# Altium PCB Display Segmental LCD118x1 DF700543-05 Backlight TB1012S.PcbDoc
Units mm, origin at the board's own origin, x right, y up, seen from the top; angles counter-clockwise.
Board outline 65 x 44 mm, 2 copper layers (Top Layer, Bottom Layer); 14 components, 17 nets, 44 pads, 0 vias.
Unrouted connection lines stored in the file: 17.
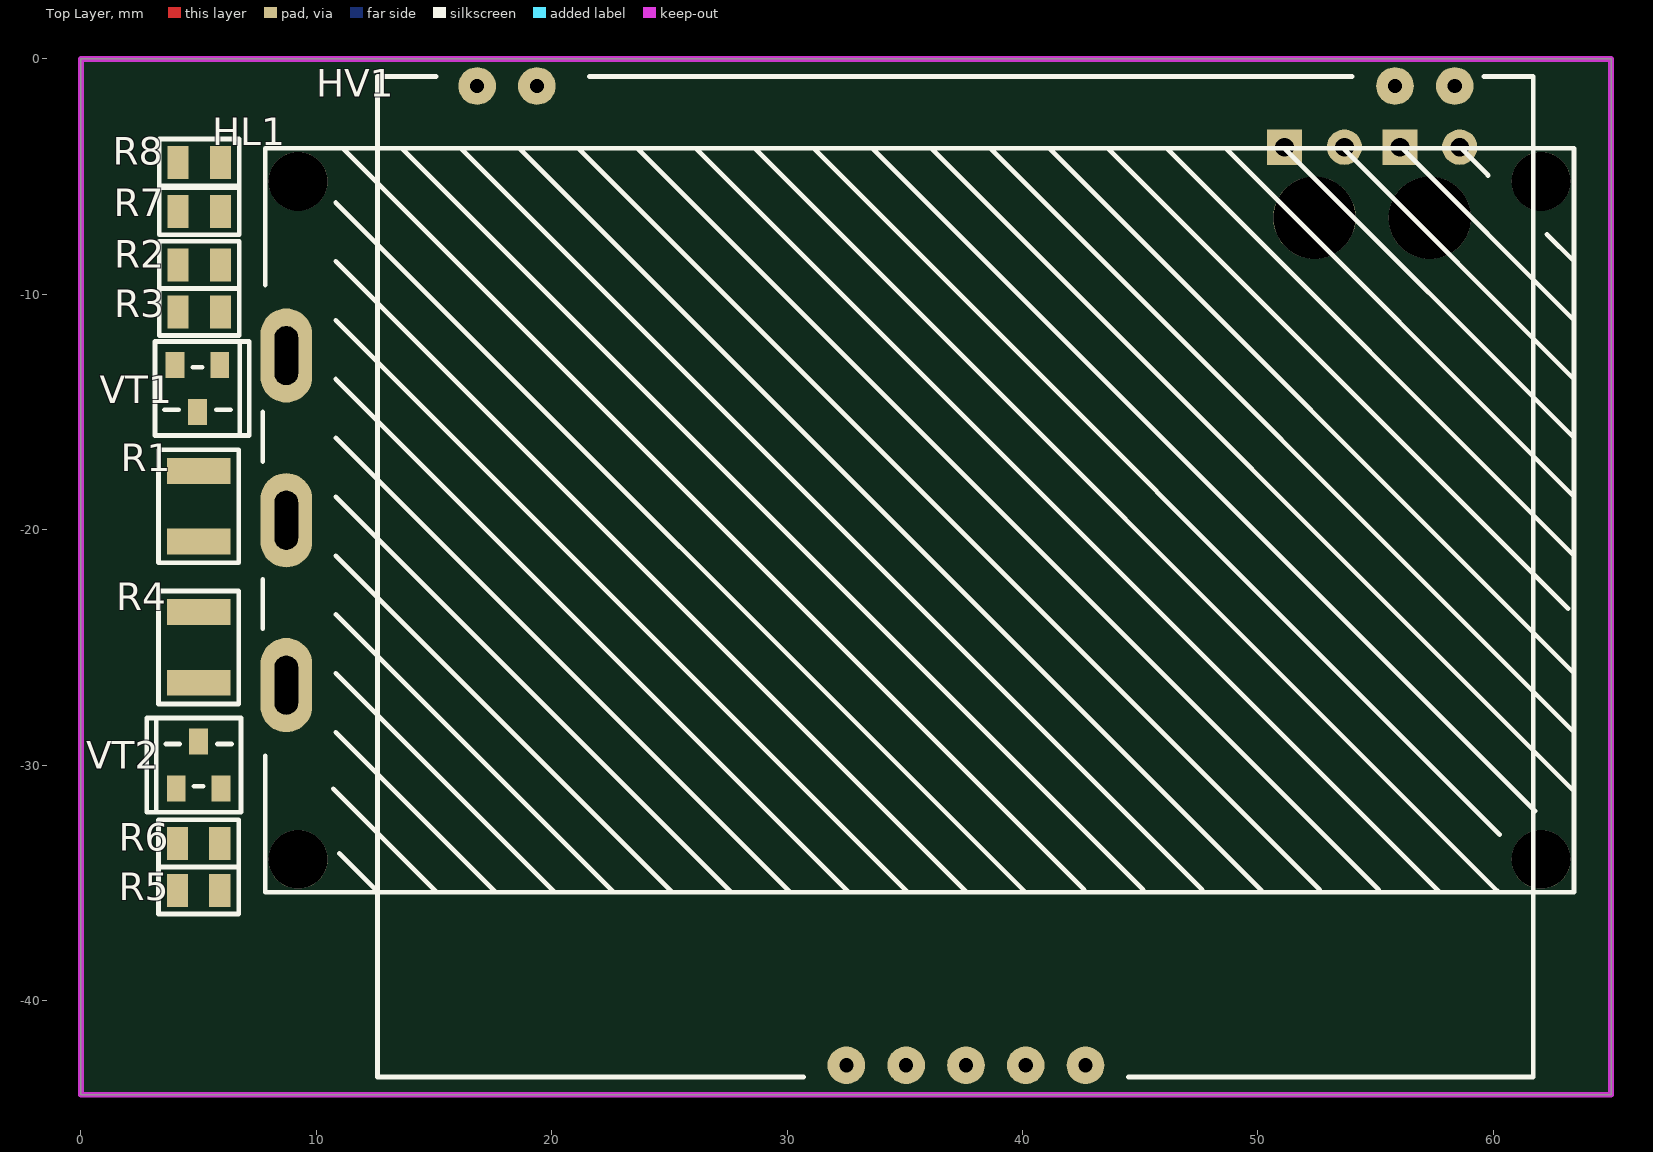
[diagram p0: Top Layer view]
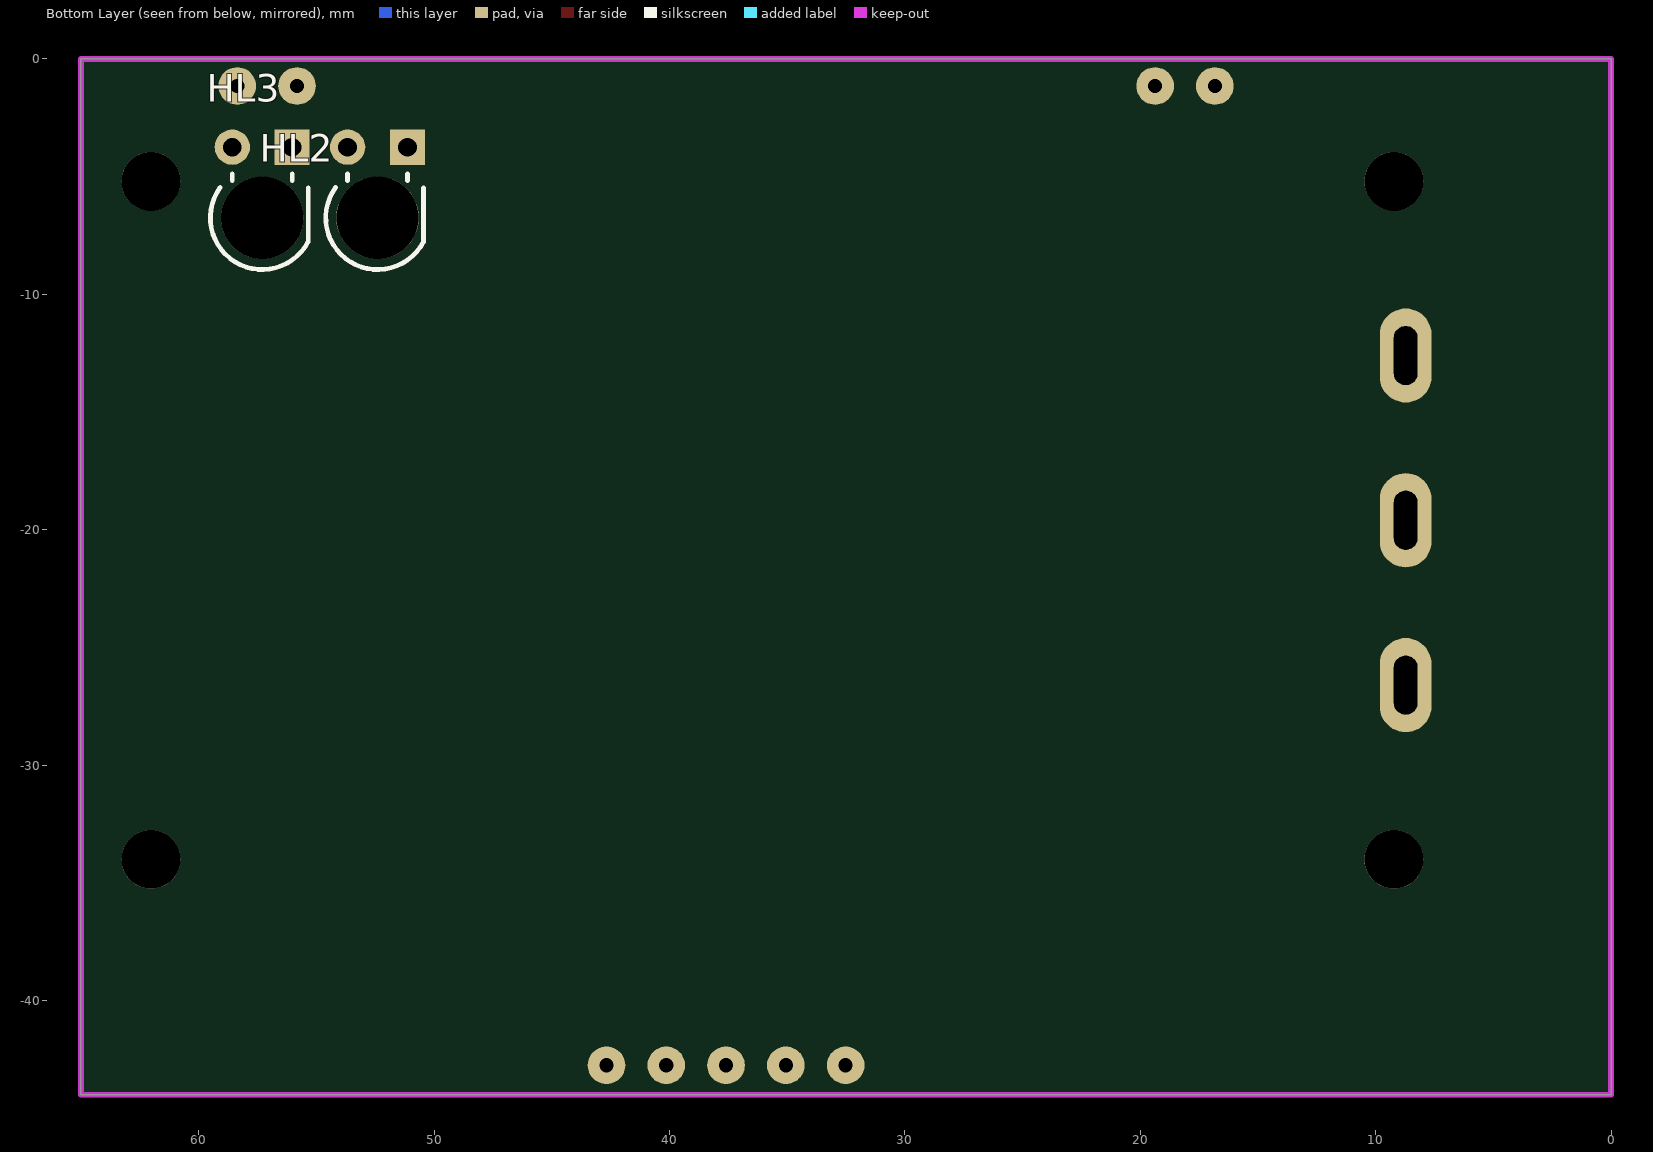
[diagram p1: Bottom Layer view, seen from below]

## Layer stack, top to bottom
Top Solder: solder mask 0.0102, Solder Resist, Dk 3.5
Top Layer: signal copper 0.0356
Dielectric 1: dielectric 0.32, FR-4, Dk 4.8
Bottom Layer: signal copper 0.0356
Bottom Solder: solder mask 0.0102, Solder Resist, Dk 3.5

## Board outline
0,-44 65,-44 65,0 0,0

## Design rules (kind name [scope] priority, off if disabled: settings)
Clearance "Schematic Clearance Constraint" [InNetClass('Signals 100kHz')] p1: gap=0.2 ignorepadtopadclearanceinfootprint=FALSE
Clearance "Schematic Clearance Constraint_2" [InNetClass('Power 0.5A')] p2: gap=0.3 ignorepadtopadclearanceinfootprint=FALSE
Clearance [All] p3: gap=0.152 ignorepadtopadclearanceinfootprint=FALSE
ComponentClearance [All] p1: gap=0 collisioncheckmode=3 verticalgap=0 showdistances=FALSE
PolygonConnect [All] p1: connectstyle=Relief reliefconductorwidth=0.254 reliefentries=4 polygonreliefangle="90 Angle" airgapwidth=0.254
RoomDefinition "Display Segmental LCD118x1 DF700543-05 Backlight TB1012S" [InComponentClass('Display Segmental LCD118x1 DF700543-05 Backlight TB1012S')] p1: confinementstyle=ConfineIn formatcopy=TRUE lockcomponents=FALSE outline 0,-44 65,-44 65,0 0,0
RoutingVias "Schematic Routing Via Style" [InNetClass('Signals 100kHz')] p1: holewidth=0.5 width=1.1 viastyle="Through Hole" minholewidth=0.4 minwidth=0.9 maxholewidth=0.8 maxwidth=1.6
RoutingVias "Schematic Routing Via Style_1" [InNetClass('Power 0.5A')] p2: holewidth=0.8 width=1.5 viastyle="Through Hole" minholewidth=0.8 minwidth=1.5 maxholewidth=0.8 maxwidth=1.5
RoutingVias [All] p3: holewidth=0.5 width=1 viastyle="Through Hole" minholewidth=0.2 minwidth=0.5 maxholewidth=1 maxwidth=2
SolderMaskExpansion [All] p1: expansion=0.102
Width "Schematic Width Constraint_1" [InNetClass('Signals 100kHz')] p1: maxlimit=0.5 minlimit=0.1 preferedwidth=0.25 minimp=50.000000 maximp=50.000000 favimp=50.000000
Width "Schematic Width Constraint_2" [InNetClass('Power 0.5A')] p2: maxlimit=1 minlimit=0.3 preferedwidth=0.5 minimp=50.000000 maximp=50.000000 favimp=50.000000
Width Width_2 [InNet('3V3')] p3: maxlimit=1 minlimit=0.15 preferedwidth=0.3 minimp=50.000000 maximp=50.000000 favimp=50.000000
Width Width_6 [InNet('GND')] p4: maxlimit=1 minlimit=0.15 preferedwidth=0.3 minimp=50.000000 maximp=50.000000 favimp=50.000000
Width Width_1 [InNet('CSR_PWR')] p5: maxlimit=1 minlimit=0.15 preferedwidth=0.3 minimp=50.000000 maximp=50.000000 favimp=50.000000
Width Width_3 [InNet('VDD_PADS')] p6: maxlimit=1 minlimit=0.15 preferedwidth=0.3 minimp=50.000000 maximp=50.000000 favimp=50.000000
Width [InNetClass('All Nets')] p7: maxlimit=1 minlimit=0.152 preferedwidth=0.152 minimp=50.000000 maximp=50.000000 favimp=50.000000
29 further rules are at their usual default settings.

## Classes and differential pairs
net class "Signals 100kHz": 5V BL_BLUE BL_GREEN DCLK DIN GND LED_ERR LED_WAIT LOAD NetHL2_2 NetHL3_2 NetR2_2 NetR5_2
net class "Power 0.5A": 5V GND NetHL1_2 NetHL1_3 NetR1_2 NetR4_2

## Components (designator, comment, footprint, x,y, rotation, side; value= is the part's Value field where it differs from the comment)
HL1 "TB1012S" "DISP BKL LED TB1012S" 35.625,-19.6 r0 top
HL2 "Yellow" LEDD3TBN 52.4,-3.75 r180 bottom
HL3 "Red" LEDD3TBN 57.3,-3.75 r180 bottom
HV1 "DF700543-05" "DISP SEG LCD128 DF700543-05" 37.595,-21.95 r0 top
R1 "20" RESC3225N 5,-19 r90 top
R2 "100" RESC2012N 5.025,-8.75 r0 top
R3 "10k" RESC2012N 5.025,-10.75 r180 top
R4 "20" RESC3225N 5,-25 r270 top
R5 "100" RESC2012N 5,-35.325 r180 top
R6 "10k" RESC2012N 5,-33.325 r0 top
R7 "330" RESC2012N 5.025,-6.475 r0 top
R8 "330" RESC2012N 5.025,-4.4 r0 top
VT1 "2N7002K-7" SOT-23-3N 4.95,-14 r180 top
VT2 "2N7002K-7" SOT-23-3N 5,-30 r0 top

## Footprints (in the part's own frame and the unit in brackets; to place one, negate y for a bottom-side part, rotate by r counter-clockwise, add the part's x,y. Pads: shape width x height; smd on the part's side, far side on the other; paste and mask are expansions set on the pad)
"DISP BKL LED TB1012S" [mm]
  round 2.5 hole 2.5 unplated paste+0 mask+0: 0(-26.4,-14.4) 0(-26.4,14.4) 0(26.4,-14.4) 0(26.4,14.4)
  oval 2.2x4 hole 1 slot 2.5 at 90 deg: 1(-26.9,7) 2(-26.9,0) 3(-26.9,-7)
  silkscreen extent -27.9,-15.8 27.8,15.8, body extent -27.5,-15.5 27.5,15.5, height 3
"DISP SEG LCD128 DF700543-05" [mm]
  round 1.6 hole 0.6: 0(-20.765,20.8) 0(-18.225,20.8) 0(18.225,20.8) 0(20.765,20.8) 1(5.08,-20.8) 2(2.54,-20.8) 3(0,-20.8) 4(-2.54,-20.8) 5(-5.08,-20.8)
  silkscreen extent -25,-21.3 24.1,21.2, body extent -24.77,-20.9 23.77,20.9, height 5.61
LEDD3TBN [mm] "LED Indication, Body TH Throad board D3 4.0x3.5mm"
  round 3.5 hole 3.5 unplated: 0(0,-3)
  round 1.5 hole 0.8: 1(-1.27,0)
  rect 1.5x1.5 hole 0.8: 2(1.27,0)
  silkscreen extent -2.2,-5.2 1.95,-1.12, body extent -1.75,-4.91 1.75,0.22, height 4.92
RESC2012N [mm] "Chip Resistor, Body 2.0x1.2mm, IPC High Density"
  rect 0.9x1.4 smd: 1(-0.9,0) 2(0.9,0)
  silkscreen extent -1.7,-1 1.7,1, body extent -1,-0.62 1,0.63, height 0.45
RESC3225N [mm] "Chip Resistor, Body 3.2x2.5mm, IPC High Density"
  rect 1.1x2.7 smd: 1(-1.5,0) 2(1.5,0)
  silkscreen extent -2.4,-1.7 2.4,1.7, body extent -1.57,-1.25 1.63,1.25, height 0.55
SOT-23-3N [mm]
  rect 0.8x1.1 smd: 1(-0.95,-1) 2(0.95,-1) 3(0,1)
  silkscreen extent -2.2,-2 1.8,2, body extent -1.45,-1.4 1.45,1.4, height 1.3

## Part data
HL1: "Display Backlight LED GB CA", Color="Green, Blue", Forward Current=250mA, Forward Voltage=3.0V, Operating temperature="-30°C +70°C", Dimension="55.00mm x 33.00mm", Group="Display - Backlight", Mounting type="Through Hole", Package=TB1012S, Part name=TB1012S, Thickness=3.20mm
HL2: library part LTL-4251, "LED Yellow TH D3mm", Forward Current=10mA, Forward Voltage=2.1V, Manufacturer=Lite-On, Operating temperature="-55°C +100°C", Package="T-1 (D3)", Color=Yellow, Component="LED Indication", Dimension="4.00mm x 3.50mm", Group="Discrete - LED - Indication", Height=6.25mm, Mounting type="Through hole", Part name=LTL-4251, Wavelength=588nm
HL3: library part LTL-4211, "LED Red TH D3mm", Forward Current=10mA, Forward Voltage=2.1V, Manufacturer=Lite-On, Operating temperature="-55°C +100°C", Package="T-1 (D3)", Color=Red, Component="LED Indication", Dimension="4.00mm x 3.50mm", Group="Discrete - LED - Indication", Height=6.25mm, Mounting type="Through hole", Part name=LTL-4211, Wavelength=657nm
HV1: "Display Segmental LCD128 Special", Color=Black, Forward Current=50mA, Operating temperature="-40°C +85°C", Dimension="48.53mm x 41.00mm", Driver=ML1001, Group="Digital - Displays -  Segmental", Mounting type="Through Hole", Package=DF700543-05, Part name=DF700543-05, Thickness=6.00mm
R1 R4: library part RC1210JR-0720RL, "RESC 20 1210(3225)", Manufacturer=Yageo, Operating temperature="-55°C +155°C", Package="1210 (3225)", Power=0.5W, Temperature coefficient=±100ppm/°C, Tolerance=±1%, Dimension="3.10mm x 2.60mm", Group="Discrete - Resistors - Ceramic", Mounting type="Surface Mount", Part name=RC1210JR-0720RL, Thickness=0.60mm, Type="Thin Film"
R2 R5: library part RC0805JR-07100RL, "RESC 100 0805(2012)", Manufacturer=Yageo, Operating temperature="-55°C +155°C", Package="0805 (2012)", Power=0.125W, Temperature coefficient=±100ppm/°C, Tolerance=±5%, Component="Resistor Ceramic", Dimension="2.00mm x 1.25mm", Group=Discrete, Height=0.60mm, Mounting type="Surface mount", Part name=RC0805JR-07100RL, Type="Thin film"
R3 R6: library part RC0805JR-0710KL, "RESC 10k 0805(2012)", Manufacturer=Yageo, Operating temperature="-55°C +155°C", Package="0805 (2012)", Power=0.125W, Temperature coefficient=±100ppm/°C, Tolerance=±5%, Component="Resistor Ceramic", Dimension="2.00mm x 1.25mm", Group=Discrete, Height=0.60mm, Mounting type="Surface mount", Part name=RC0805JR-0710KL, Type="Thin film"
R7 R8: library part RC0805JR-073300RL, "RESC 330 0805(2012)", Manufacturer=Yageo, Operating temperature="-55°C +155°C", Package="0805 (2012)", Power=0.125W, Temperature coefficient=±100ppm/°C, Tolerance=±5%, Component="Resistor Ceramic", Dimension="2.00mm x 1.25mm", Group=Discrete, Height=0.60mm, Mounting type="Surface mount", Part name=RC0805JR-073300RL, Type="Thin film"
VT1 VT2: "MOSFET N 0.38A 60V", Drain-Source ON-Resistance="2 Ohm", Drain-Source Voltage=60V, Drain Current=380mA, Gate-Source Voltage=±20V, Manufacturer="Diodes Incorporated", Operating temperature="-55°C +150°C", Package=SOT-23-3, Power Dissipation=370mW, Component="Transistor FET", Dimension="2.90mm x 2.80mm", FET Type=N-Channel, Group="Discrete - Transistors - FET", Height=1.00mm, Mounting type="Surface mount", Part name=2N7002K-7

## Nets (pads, with @x,y where several pads share a name; then routed paths per layer and width w, separated by ;. In a path a pad name is that pad's centre, name@x,y a point inside that pad or via, vN(x,y) a via of type N, cw(c..) or ccw(c..) an arc to the next point about the centre after c; other vN are vias at no path point)
5V: HL1.1 HL2.1 HL3.1 HV1.1
BL_BLUE: R5.1
BL_GREEN: R2.1
DCLK: HV1.5
DIN: HV1.4
GND: HV1.2 R3.2 R6.2 VT1.2 VT2.2
LED_ERR: R8.1
LED_WAIT: R7.1
LOAD: HV1.3
NetHL1_2: HL1.2 R1.1
NetHL1_3: HL1.3 R4.1
NetHL2_2: HL2.2 R7.2
NetHL3_2: HL3.2 R8.2
NetR1_2: R1.2 VT1.3
NetR2_2: R2.2 R3.1 VT1.1
NetR4_2: R4.2 VT2.3
NetR5_2: R5.2 R6.1 VT2.1
pads on no net: HL1.0 HL2.0 HL3.0 HV1.0

## Keep-outs
Keep-Out Layer:
  the board outline again, w0.25

## Text inside footprints (layer, text, board x,y; h text height)
HV1: Mechanical 13 "PROG" at 18.395,-10.05 h1.52; Mechanical 13 "RUN" at 26.695,-10.05 h1.52; Mechanical 13 "STOP" at 33.795,-10.05 h1.52; Mechanical 13 "TIME" at 18.495,-24.85 h1.52; Mechanical 13 "SPEED" at 38.995,-24.75 h1.52; Mechanical 13 "Hum %" at 48.995,-27.75 h1.52; Mechanical 13 "m/s" at 48.895,-30.65 h1.52; Mechanical 13 "km/h" at 48.995,-33.15 h1.52